# EAGLE board witch-transfer1 (EAGLE 6.4)
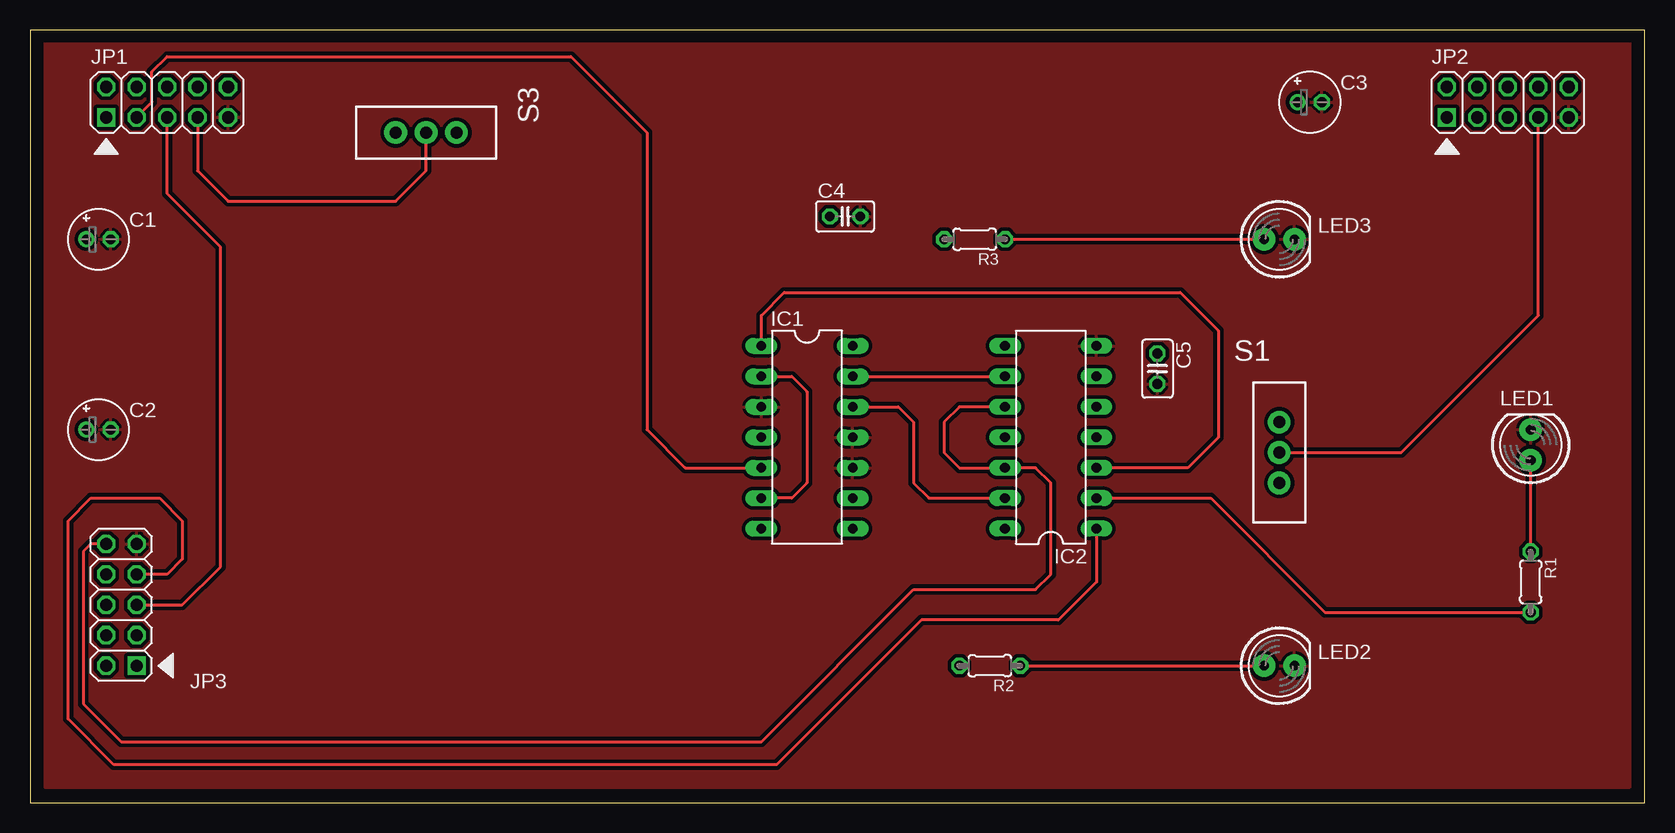
[diagram p0: board, top side]
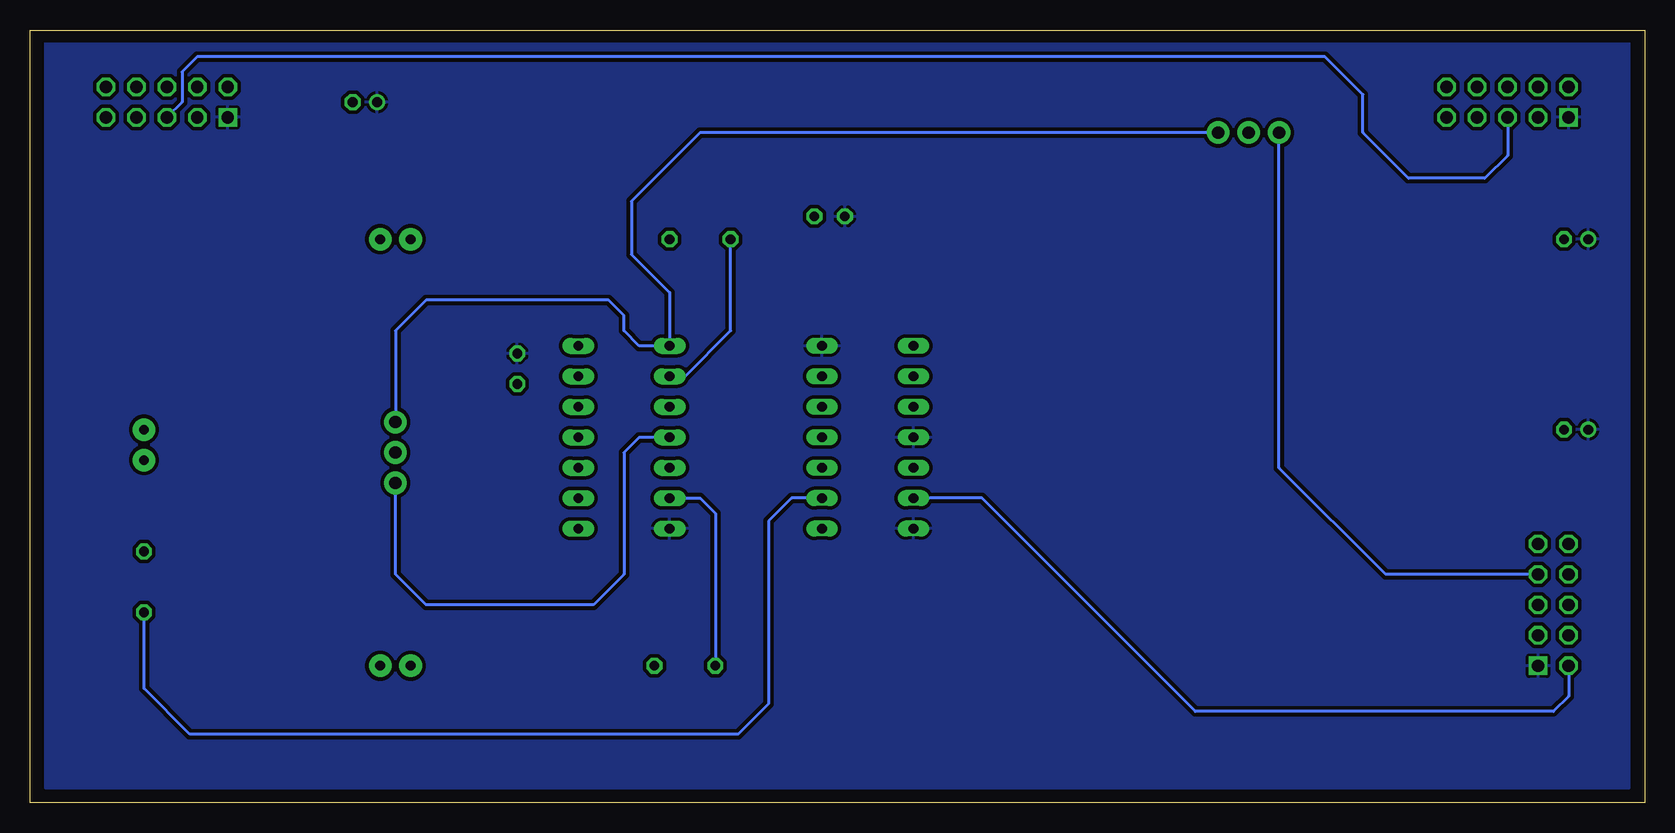
[diagram p1: board, bottom side, seen from below]

Size 134.6 x 64.44 mm. Coordinates in mm from the lower left corner, seen from the top.
Outline: 0,0 134.6,0 134.6,64.44 0,64.44 0,0
Copper layers (1*16): Top 0.035mm / dielectric 1.5mm / Bottom 0.035mm
Design rules "default": minimum track width 10mil, minimum drill 24mil, track to track 8mil, track to pad 8mil, pad to pad 8mil, via to via 8mil, smd to smd 8mil, copper to edge 40mil, drill to drill 8mil, minimum pad ring 10mil, minimum via ring 8mil, stop-mask expansion 4mil, vias tented up to drill 0mil, thermal gap 10mil

## Footprints (pad centres in the part's own frame; a part is rotated, then mirrored left to right if it is on the bottom)
E2-5 = drill 0.813 pad 1.27: + -1.016,0 | drill 0.813 pad 1.27 octagon: - 1.016,0
C025-025X050 = drill 0.813 octagon: 1 -1.27,0; 2 1.27,0
DIL14 = drill 0.813 long: 1 -7.62,-3.81; 2 -5.08,-3.81; 3 -2.54,-3.81; 4 0,-3.81; 5 2.54,-3.81; 6 5.08,-3.81; 7 7.62,-3.81; 8 7.62,3.81; 9 5.08,3.81; 10 2.54,3.81; 11 0,3.81; 12 -2.54,3.81; 13 -5.08,3.81; 14 -7.62,3.81
2X05 = drill 1.016 square: 1 -5.08,-1.27 | drill 1.016 octagon: 2 -5.08,1.27; 3 -2.54,-1.27; 4 -2.54,1.27; 5 0,-1.27; 6 0,1.27; 7 2.54,-1.27; 8 2.54,1.27; 9 5.08,-1.27; 10 5.08,1.27
LED5MM = drill 0.813 pad 1.88: A -1.27,0; K 1.27,0
0204/5 = drill 0.813 octagon: 1 -2.54,0; 2 2.54,0
SWITCH-SPDT = drill 1.016 pad 1.88: 1 0,2.54; 2 0,0; 3 0,-2.54

## Placement (x,y rotation side)
C1  [E2-5]  5.71,46.99 0 top
C2  [E2-5]  5.71,31.11 0 top
C3  [E2-5]  106.68,58.42 0 top
C4  [C025-025X050]  67.94,48.9 0 top
C5  [C025-025X050]  93.98,36.2 270 top
IC1  74LS73N  [DIL14]  64.77,30.48 270 top
IC2  74S08N  [DIL14]  85.09,30.48 90 top
JP1  [2X05]  11.43,58.42 0 top
JP2  [2X05]  123.19,58.42 0 top
JP3  [2X05]  7.62,16.51 90 top
LED1  [LED5MM]  125.09,29.84 90 top
LED2  [LED5MM]  104.14,11.43 0 top
LED3  [LED5MM]  104.14,46.99 0 top
R1  330R  [0204/5]  125.09,18.41 270 top
R2  330R  [0204/5]  80.01,11.43 180 top
R3  330R  [0204/5]  78.74,46.99 180 top
S1  [SWITCH-SPDT]  104.14,29.21 0 top
S3  [SWITCH-SPDT]  33.02,55.88 270 top

## Library data of the parts
C1-C5 R1-R3 = resistor
IC1 IC2 = 74xx-us
JP1-JP3 = pinhead
LED1-LED3 = SparkFun-LED
S1 S3 = SparkFun-Electromechanical

## Nets
10A_PULSES: IC2.1 JP3.7 S3.3
N$1: JP2.7 S1.2
N$2: IC2.10 IC2.12 JP3.10
N$3: IC1.13 IC2.9 R3.2
N$4: IC1.12 IC2.13 R2.2
N$5: IC2.11 S1.3
N$6: LED2.A R2.1
N$7: LED3.A R3.1
N$8: LED1.A R1.1
N$11: IC1.1 IC2.3
N$32: JP1.5 JP2.5 JP3.5
N$43: IC2.8 S1.1 S3.1
RESET: IC1.2 IC1.6 JP3.2
TRANSFER_PULSE: JP1.7 S3.2
VDD: C1.+ C2.+ C3.+ C4.1 C5.1 IC1.4 IC1.7 IC1.14 IC2.14 JP1.1 JP2.1 JP3.1
VSS: C1.- C2.- C3.- C4.2 C5.2 IC1.3 IC1.10 IC1.11 IC2.7 JP1.9 JP2.9 JP3.9 LED1.K LED2.K LED3.K
ZC: IC1.5 JP1.3
ZC_OUTPUT: IC1.9 IC2.2 R1.2

## Tracks (layer width: path | path; a pad name or v marks a point on that pad's centre or on a via)
10A_PULSES
  Top 0.254: IC2.1 88.9,18.41 85.72,15.24 74.3,15.24 62.23,3.17 6.99,3.17 3.17,6.99 3.17,23.5 5.08,25.4 10.79,25.4 12.7,23.5 12.7,20.32 11.43,19.05 JP3.7
  Bottom 0.254: JP3.7 21.59,19.05 30.48,27.94 S3.3
N$1
  Top 0.254: S1.2 114.3,29.21 125.73,40.64 JP2.7
N$2
  Top 0.254: IC2.10 77.47,33.02 76.2,31.75 76.2,29.21 77.47,27.94 IC2.12 83.82,27.94 85.09,26.67 85.09,19.05 83.82,17.78 73.66,17.78 60.96,5.08 7.62,5.08 4.45,8.26 4.45,20.95 5.08,21.59 JP3.10
N$3
  Top 0.254: IC1.13 IC2.9
  Bottom 0.254: IC2.9 80.01,35.56 76.2,39.37 R3.2
N$4
  Top 0.254: IC1.12 72.39,33.02 73.66,31.75 73.66,26.67 74.93,25.4 IC2.13
  Bottom 0.254: IC2.13 78.74,25.4 77.47,24.13 R2.2
N$5
  Bottom 0.254: IC2.11 83.82,30.48 85.09,29.21 85.09,19.05 87.63,16.51 101.6,16.51 104.14,19.05 S1.3
N$6
  Top 0.254: R2.1 LED2.A
N$7
  Top 0.254: R3.1 LED3.A
N$8
  Top 0.254: R1.1 LED1.A
N$11
  Top 0.254: IC1.1 60.96,40.64 62.87,42.55 95.89,42.55 99.06,39.37 99.06,30.48 96.52,27.94 IC2.3
N$32
  Top 0.254: JP3.5 12.7,16.51 15.88,19.68 15.88,46.35 11.43,50.8 JP1.5
  Bottom 0.254: JP1.5 11.43,53.98 13.34,52.07 19.68,52.07 23.5,55.88 23.5,59.05 26.67,62.23 120.65,62.23 121.92,60.96 121.92,58.42 JP2.5
N$43
  Bottom 0.254: S1.1 104.14,39.37 101.6,41.91 86.36,41.91 85.09,40.64 85.09,39.37 83.82,38.1 IC2.8 81.28,42.55 84.45,45.72 84.45,50.16 78.74,55.88 S3.1
RESET
  Top 0.254: IC1.2 63.5,35.56 64.77,34.29 64.77,26.67 63.5,25.4 IC1.6
  Bottom 0.254: JP3.2 6.35,8.89 7.62,7.62 37.47,7.62 55.24,25.4 IC1.6
TRANSFER_PULSE
  Top 0.254: JP1.7 13.97,52.7 16.51,50.16 30.48,50.16 33.02,52.7 S3.2
VDD
  pour Bottom (isolate 0.305): 1.27,63.5 133.35,63.5 133.35,1.27 1.27,1.27
VSS
  pour Top (isolate 0.305): 1.27,63.5 133.35,63.5 133.35,1.27 1.27,1.27
ZC
  Top 0.254: JP1.3 10.16,58.42 10.16,60.96 11.43,62.23 45.09,62.23 51.44,55.88 51.44,31.11 54.61,27.94 IC1.5
ZC_OUTPUT
  Top 0.254: IC2.2 98.42,25.4 107.95,15.88 R1.2
  Bottom 0.254: IC1.9 71.12,25.4 73.03,23.5 73.03,8.26 75.56,5.71 121.28,5.71 125.09,9.53 R1.2

## Text on the board
tDocu: SEND | RECEIVE | CLEAR | ZC | COMP | ADD | PULSE GENERATOR